# EAGLE board Swanky Tumelo (EAGLE 7.6.0)

Size 73.58 x 63.39 mm. Coordinates in mm from the lower left corner, seen from the top.
Outline: 0,0 56.82,0 56.82,53.33 0,53.33 0,0
Copper layers (1*16): Top 0.035mm / dielectric 1.5mm / Bottom 0.035mm
Design rules "default": minimum track width 10mil, minimum drill 24mil, track to track 8mil, track to pad 8mil, pad to pad 8mil, via to via 8mil, smd to smd 8mil, copper to edge 40mil, drill to drill 8mil, minimum pad ring 10mil, minimum via ring 8mil, stop-mask expansion 4mil, vias tented up to drill 0mil, thermal gap 10mil

## Footprints (pad centres in the part's own frame; a part is rotated, then mirrored left to right if it is on the bottom)
LED5MM = drill 0.813 octagon: A -1.27,0; K 1.27,0
0207/10 = drill 0.813 octagon: 1 -5.08,0; 2 5.08,0
ARDUINO_UNO = drill 1.016 pad 1.88: 0 63.5,50.8; 1 60.96,50.8; 2 58.42,50.8; 3 55.88,50.8; 3.3V 35.56,2.54; 4 53.34,50.8; 5 50.8,50.8; 5V 38.1,2.54; 6 48.26,50.8; 7 45.72,50.8; 8 41.656,50.8; 9 39.116,50.8; 10 36.576,50.8; 11 34.036,50.8; 12 31.496,50.8; 13 28.956,50.8; A0 50.8,2.54; A1 53.34,2.54; A2 55.88,2.54; A3 58.42,2.54; A4 60.96,2.54; A5 63.5,2.54; AREF 23.876,50.8; GND 26.416,50.8; GND. 43.18,2.54; GND.. 40.64,2.54; I/OREF 30.48,2.54; N/C 27.94,2.54; RESET 33.02,2.54; SCL 18.796,50.8; SDA 21.336,50.8; VIN 45.72,2.54 | hole 3.2: 66.04,7.62; 66.04,35.56; 15.24,50.8; 13.97,2.54

## Placement (x,y rotation side)
Dg_kabeza  [LED5MM]  5,137.08 0 top  (outside the outline)
Dg_kanombe  [LED5MM]  5,86.28 0 top  (outside the outline)
Dg_mumujyi  [LED5MM]  5,48.18 0 top
Dg_remera  [LED5MM]  5,98.98 0 top  (outside the outline)
Dr_kabeza  [LED5MM]  5,162.48 0 top  (outside the outline)
Dr_kanombe  [LED5MM]  5,60.88 0 top
Dr_mumujyi  [LED5MM]  5,35.48 0 top
Dr_remera  [LED5MM]  5,124.38 0 top  (outside the outline)
Dy_kabeza  [LED5MM]  5,149.78 0 top  (outside the outline)
Dy_kanombe  [LED5MM]  5,73.58 0 top  (outside the outline)
Dy_mumujyi  [LED5MM]  5,22.78 0 top
Dy_remera  [LED5MM]  5,111.68 0 top  (outside the outline)
R1  1k‎Ω  [0207/10]  5,175.18 0 top  (outside the outline)
R3  1k‎Ω  [0207/10]  5,187.88 0 top  (outside the outline)
R4  1k‎Ω  [0207/10]  5,200.58 0 top  (outside the outline)
R5  1k‎Ω  [0207/10]  5,213.28 0 top  (outside the outline)
R6  1k‎Ω  [0207/10]  5,225.98 0 top  (outside the outline)
R7  1k‎Ω  [0207/10]  5,238.68 0 top  (outside the outline)
R8  1k‎Ω  [0207/10]  5,251.38 0 top  (outside the outline)
R9  1k‎Ω  [0207/10]  5,264.08 0 top  (outside the outline)
R10  1k‎Ω  [0207/10]  5,276.78 0 top  (outside the outline)
R11  1k‎Ω  [0207/10]  5,289.48 0 top  (outside the outline)
R12  1k‎Ω  [0207/10]  5,302.18 0 top  (outside the outline)
R13  1k‎Ω  [0207/10]  5,314.88 0 top  (outside the outline)
U2  [ARDUINO_UNO]  5,10.08 0 top

## Library data of the parts
Dg_kabeza Dg_kanombe Dg_mumujyi Dg_remera Dr_kabeza Dr_kanombe Dr_mumujyi Dr_remera Dy_kabeza Dy_kanombe Dy_mumujyi Dy_remera R1 R3-R13 U2 = AUTODESK_CIRCUITS_BREADBOARD

## Nets
N$1: Dg_kabeza.A R13.2
N$2: Dy_kabeza.A R12.2
N$3: Dr_kabeza.A R11.2
N$4: Dg_remera.A R7.1 R7.2 U2.12
N$5: Dy_remera.A R6.1 R6.2 U2.11
N$6: Dr_remera.A R5.1 R5.2 U2.10
N$7: Dg_mumujyi.A R10.2
N$8: Dy_mumujyi.A R9.2
N$9: Dr_mumujyi.A R8.2
N$10: Dg_kanombe.A R4.2
N$11: Dy_kanombe.A R3.2
N$12: Dr_kanombe.A R1.2
N$13: R1.1 U2.1
N$14: R3.1 U2.2
N$15: R4.1 U2.3
N$16: R8.1 U2.7
N$17: R9.1 U2.8
N$18: R10.1 U2.9
N$19: R11.1 R12.1 R13.1 U2.4 U2.5 U2.6
N$20: Dg_kabeza.K Dg_kanombe.K Dg_mumujyi.K Dg_remera.K Dr_kabeza.K Dr_kanombe.K Dr_mumujyi.K Dr_remera.K Dy_kabeza.K Dy_kanombe.K Dy_mumujyi.K Dy_remera.K U2.GND

## Tracks (layer width: path | path; a pad name or v marks a point on that pad's centre or on a via)
N$1  (1 unrouted)
N$2  (1 unrouted)
N$3  (1 unrouted)
N$4  (3 unrouted)
N$5  (3 unrouted)
N$6  (3 unrouted)
N$7  (1 unrouted)
N$8  (1 unrouted)
N$9  (1 unrouted)
N$10  (1 unrouted)
N$11  (1 unrouted)
N$12  (1 unrouted)
N$13  (1 unrouted)
N$14  (1 unrouted)
N$15  (1 unrouted)
N$16  (1 unrouted)
N$17  (1 unrouted)
N$18  (1 unrouted)
N$19  (5 unrouted)
N$20  (12 unrouted)